# Altium PCB PCB.PcbDoc
Units mil, origin at the board's own origin, x right, y up, seen from the top; angles counter-clockwise.
Board outline 6000 x 4000 mil, 2 copper layers (Top Layer, Bottom Layer); 4 components, 0 nets, 523 pads, 0 vias.
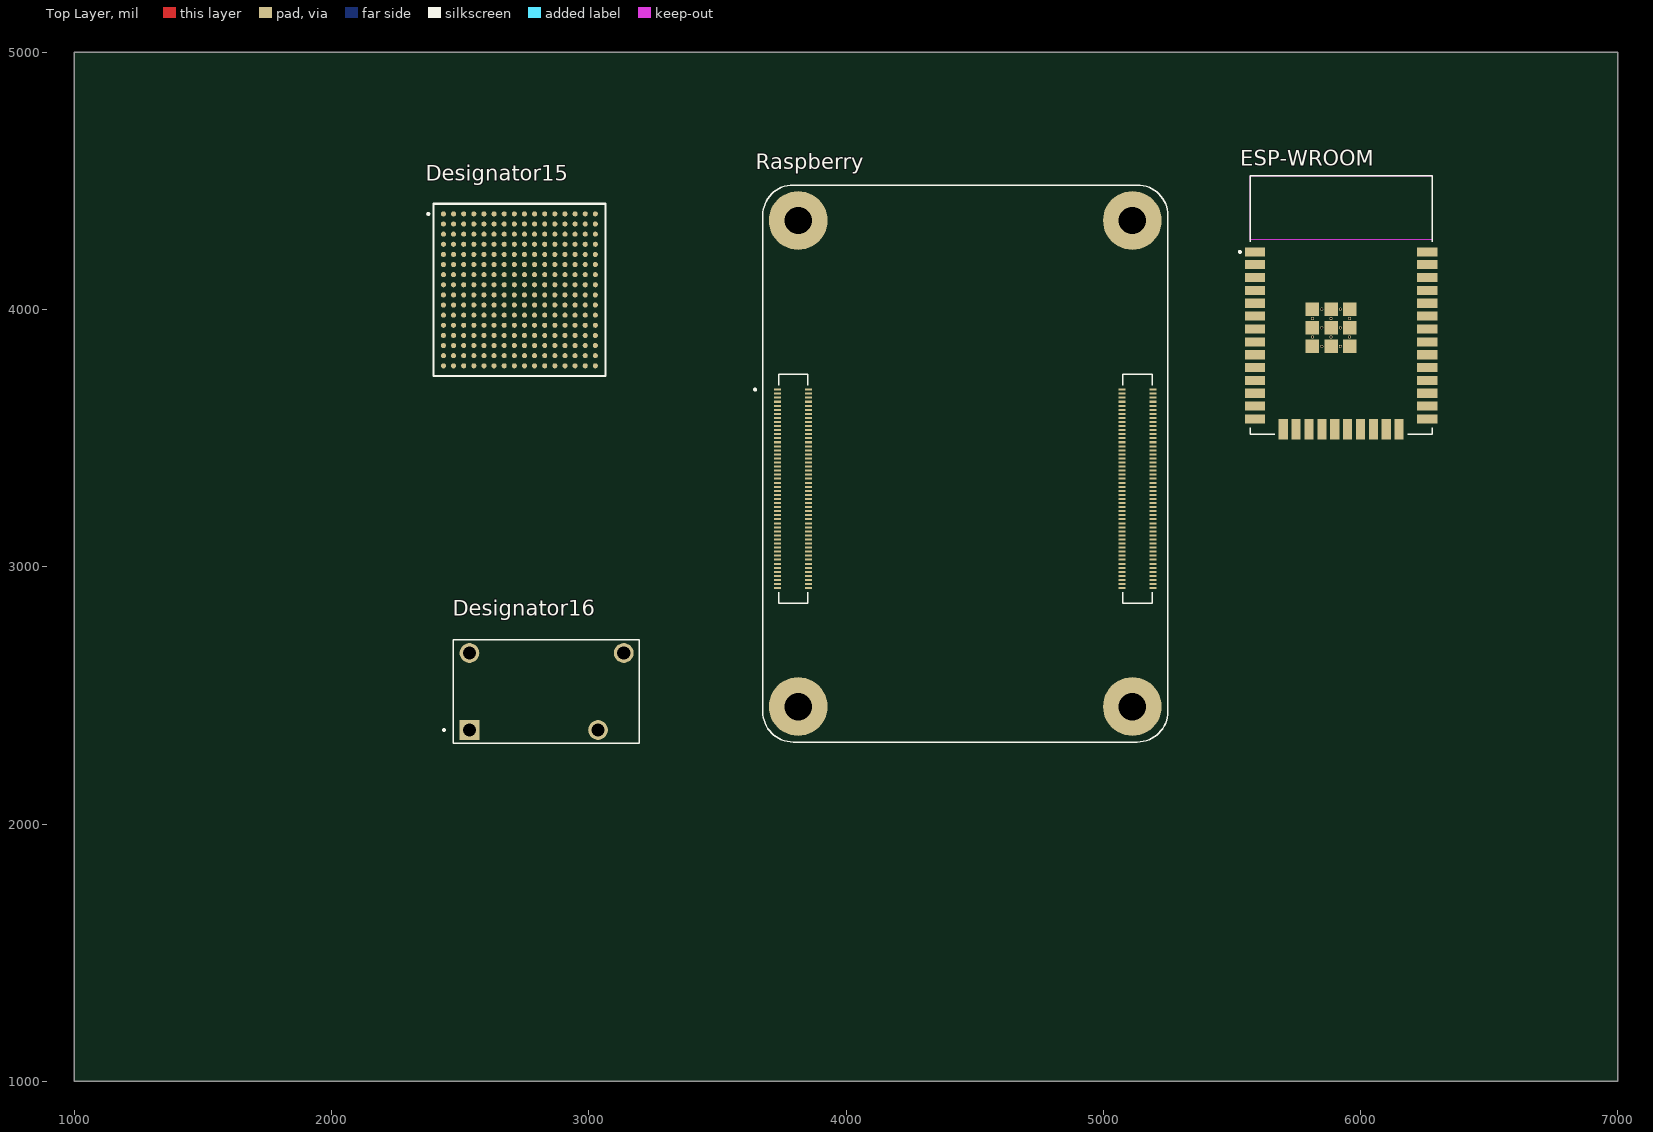
[diagram p0: Top Layer view]
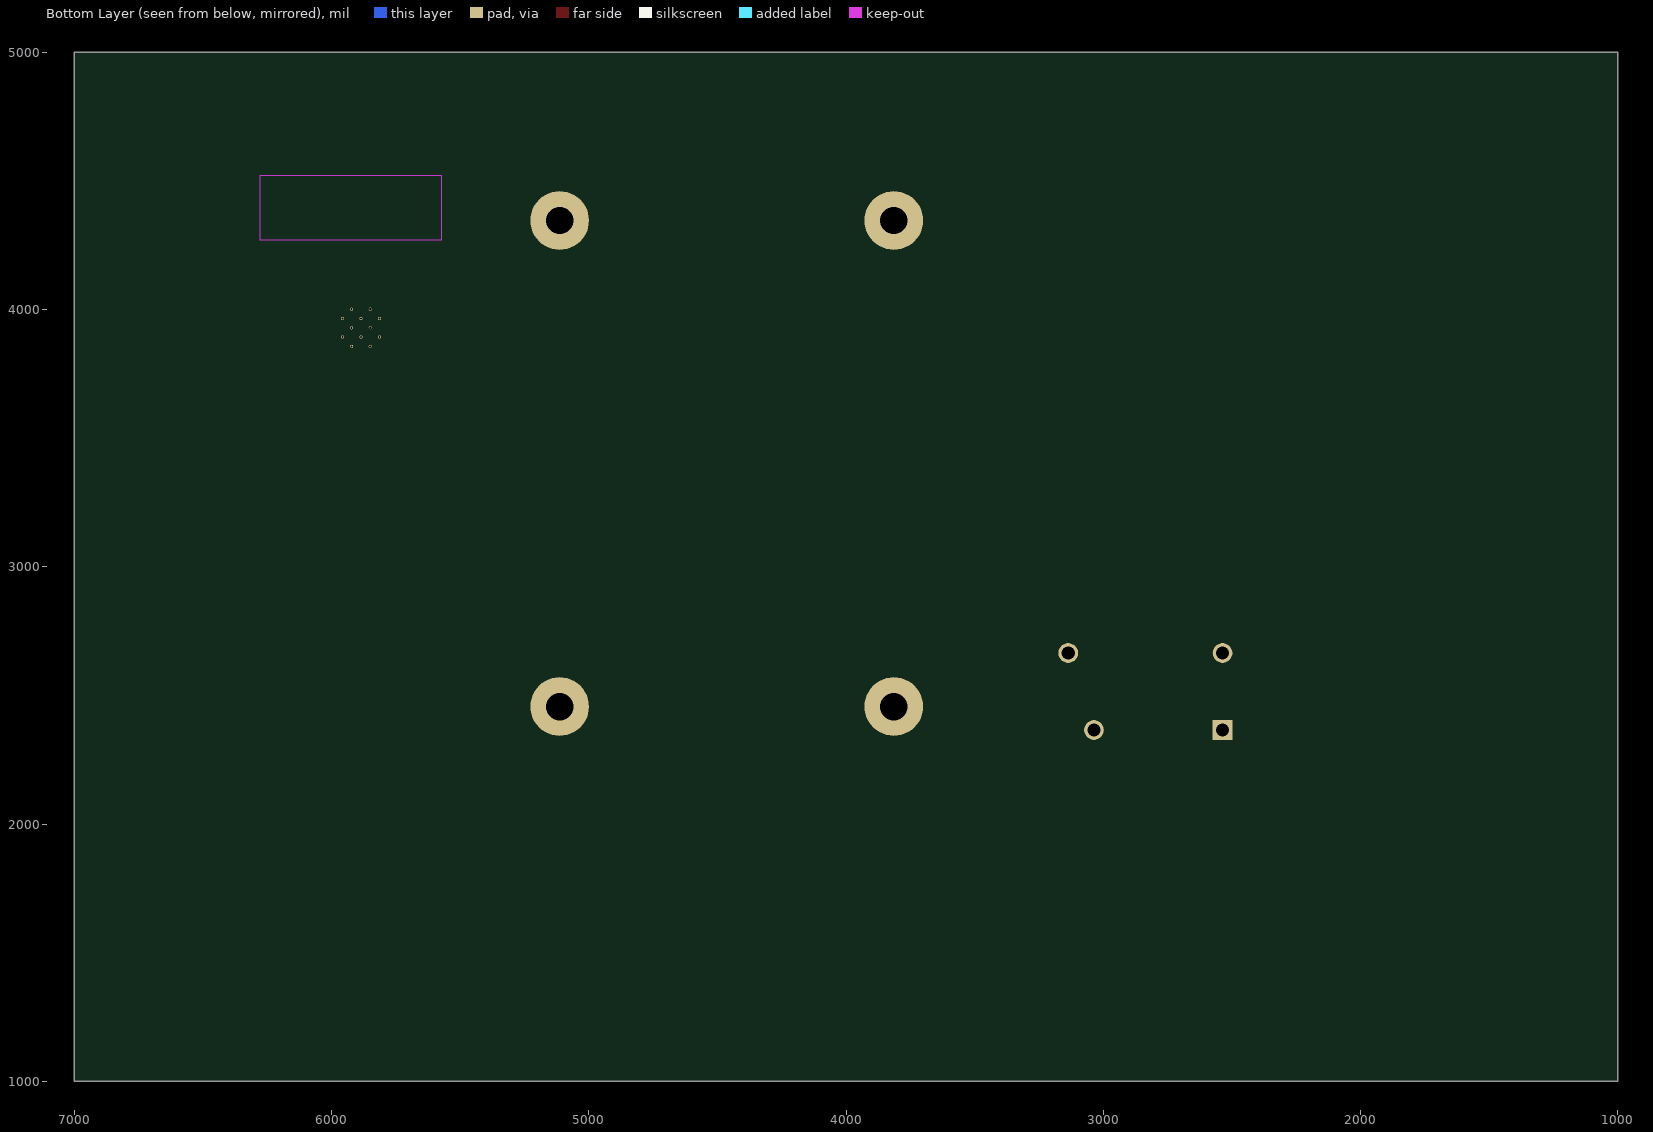
[diagram p1: Bottom Layer view, seen from below]

## Layer stack, top to bottom
Top Solder: solder mask 0.4, Solder Resist, Dk 3.5
Top Layer: signal copper 1.4
Dielectric 1: dielectric 12.6, FR-4, Dk 4.8
Bottom Layer: signal copper 1.4
Bottom Solder: solder mask 0.4, Solder Resist, Dk 3.5

## Board outline
1000,1000 7000,1000 7000,5000 1000,5000

## Design rules (kind name [scope] priority, off if disabled: settings)
Clearance [All] p1: gap=10 ignorepadtopadclearanceinfootprint=FALSE except(0: Arc-Hole Track-Hole SMDPad-Hole THPad-Hole Via-Hole Fill-Hole Poly-Hole Region-Hole Text-Hole)
PolygonConnect [All] p1: connectstyle=Relief reliefconductorwidth=10 reliefentries=4 polygonreliefangle="90 Angle" airgapwidth=10
RoomDefinition WROOM [InComponentClass('WROOM')] p1: confinementstyle=ConfineIn formatcopy=TRUE lockcomponents=FALSE outline 5540,3430 6340,3430 6340,4590 5540,4590
RoutingVias [All] p1: holewidth=28 width=50 viastyle="Through Hole" minholewidth=28 minwidth=50 maxholewidth=28 maxwidth=50
SolderMaskExpansion [All] p1: expansion=4
Width [All] p1: maxlimit=10 minlimit=10 preferedwidth=10
30 further rules are at their usual default settings.

## Classes and differential pairs
component class WROOM: ESP-WROOM
component class Sheet1: FPGA
component class Relai: Relais?
component class Raspberry: Raspberry

## Components (designator, comment, footprint, x,y, rotation, side; value= is the part's Value field where it differs from the comment)
Designator15 "Comment" BGA256C100P16X16_1700X1700X155 2730.32,4076.54 r0 top
Designator16 "Comment" RELAY_PRE29-12V-S-450-1A-EF 2835,2515 r0 top
ESP-WROOM "ESP32-WROOM-32" MODULE_ESP32-WROOM-32 5925,4017.28 r0 top
Raspberry "SC0690" MODULE_SC0690 4463.66,3401.34 r90 top

## Footprints (in the part's own frame and the unit in brackets; to place one, negate y for a bottom-side part, rotate by r counter-clockwise, add the part's x,y. Pads: shape width x height; smd on the part's side, far side on the other; paste and mask are expansions set on the pad)
BGA256C100P16X16_1700X1700X155 [mm]
  round 0.5 smd: A1(-7.5,7.5) A2(-6.5,7.5) A3(-5.5,7.5) A4(-4.5,7.5) A5(-3.5,7.5) A6(-2.5,7.5) A7(-1.5,7.5) A8(-0.5,7.5) A9(0.5,7.5) A10(1.5,7.5) A11(2.5,7.5) A12(3.5,7.5) A13(4.5,7.5) A14(5.5,7.5) A15(6.5,7.5) A16(7.5,7.5) B1(-7.5,6.5) B2(-6.5,6.5) B3(-5.5,6.5) B4(-4.5,6.5) B5(-3.5,6.5) B6(-2.5,6.5) B7(-1.5,6.5) B8(-0.5,6.5) B9(0.5,6.5) B10(1.5,6.5) B11(2.5,6.5) B12(3.5,6.5) B13(4.5,6.5) B14(5.5,6.5) B15(6.5,6.5) B16(7.5,6.5) C1(-7.5,5.5) C2(-6.5,5.5) C3(-5.5,5.5) C4(-4.5,5.5) C5(-3.5,5.5) C6(-2.5,5.5) C7(-1.5,5.5) C8(-0.5,5.5) C9(0.5,5.5) C10(1.5,5.5) C11(2.5,5.5) C12(3.5,5.5) C13(4.5,5.5) C14(5.5,5.5) C15(6.5,5.5) C16(7.5,5.5) D1(-7.5,4.5) D2(-6.5,4.5) D3(-5.5,4.5) D4(-4.5,4.5) D5(-3.5,4.5) D6(-2.5,4.5) D7(-1.5,4.5) D8(-0.5,4.5) D9(0.5,4.5) D10(1.5,4.5) D11(2.5,4.5) D12(3.5,4.5) D13(4.5,4.5) D14(5.5,4.5) D15(6.5,4.5) D16(7.5,4.5) E1(-7.5,3.5) E2(-6.5,3.5) E3(-5.5,3.5) E4(-4.5,3.5) E5(-3.5,3.5) E6(-2.5,3.5) E7(-1.5,3.5) E8(-0.5,3.5) E9(0.5,3.5) E10(1.5,3.5) E11(2.5,3.5) E12(3.5,3.5) E13(4.5,3.5) E14(5.5,3.5) E15(6.5,3.5) E16(7.5,3.5) F1(-7.5,2.5) F2(-6.5,2.5) F3(-5.5,2.5) F4(-4.5,2.5) F5(-3.5,2.5) F6(-2.5,2.5) F7(-1.5,2.5) F8(-0.5,2.5) F9(0.5,2.5) F10(1.5,2.5) F11(2.5,2.5) F12(3.5,2.5) F13(4.5,2.5) F14(5.5,2.5) F15(6.5,2.5) F16(7.5,2.5) G1(-7.5,1.5) G2(-6.5,1.5) G3(-5.5,1.5) G4(-4.5,1.5) G5(-3.5,1.5) G6(-2.5,1.5) G7(-1.5,1.5) G8(-0.5,1.5) G9(0.5,1.5) G10(1.5,1.5) G11(2.5,1.5) G12(3.5,1.5) G13(4.5,1.5) G14(5.5,1.5) G15(6.5,1.5) G16(7.5,1.5) H1(-7.5,0.5) H2(-6.5,0.5) H3(-5.5,0.5) H4(-4.5,0.5) H5(-3.5,0.5) H6(-2.5,0.5) H7(-1.5,0.5) H8(-0.5,0.5) H9(0.5,0.5) H10(1.5,0.5) H11(2.5,0.5) H12(3.5,0.5) H13(4.5,0.5) H14(5.5,0.5) H15(6.5,0.5) H16(7.5,0.5) J1(-7.5,-0.5) J2(-6.5,-0.5) J3(-5.5,-0.5) J4(-4.5,-0.5) J5(-3.5,-0.5) J6(-2.5,-0.5) J7(-1.5,-0.5) J8(-0.5,-0.5) J9(0.5,-0.5) J10(1.5,-0.5) J11(2.5,-0.5) J12(3.5,-0.5) J13(4.5,-0.5) J14(5.5,-0.5) J15(6.5,-0.5) J16(7.5,-0.5) K1(-7.5,-1.5) K2(-6.5,-1.5) K3(-5.5,-1.5) K4(-4.5,-1.5) K5(-3.5,-1.5) K6(-2.5,-1.5) K7(-1.5,-1.5) K8(-0.5,-1.5) K9(0.5,-1.5) K10(1.5,-1.5) K11(2.5,-1.5) K12(3.5,-1.5) K13(4.5,-1.5) K14(5.5,-1.5) K15(6.5,-1.5) K16(7.5,-1.5) L1(-7.5,-2.5) L2(-6.5,-2.5) L3(-5.5,-2.5) L4(-4.5,-2.5) L5(-3.5,-2.5) L6(-2.5,-2.5) L7(-1.5,-2.5) L8(-0.5,-2.5) L9(0.5,-2.5) L10(1.5,-2.5) L11(2.5,-2.5) L12(3.5,-2.5) L13(4.5,-2.5) L14(5.5,-2.5) L15(6.5,-2.5) L16(7.5,-2.5) M1(-7.5,-3.5) M2(-6.5,-3.5) M3(-5.5,-3.5) M4(-4.5,-3.5) M5(-3.5,-3.5) M6(-2.5,-3.5) M7(-1.5,-3.5) M8(-0.5,-3.5) M9(0.5,-3.5) M10(1.5,-3.5) M11(2.5,-3.5) M12(3.5,-3.5) M13(4.5,-3.5) M14(5.5,-3.5) M15(6.5,-3.5) M16(7.5,-3.5) N1(-7.5,-4.5) N2(-6.5,-4.5) N3(-5.5,-4.5) N4(-4.5,-4.5) N5(-3.5,-4.5) N6(-2.5,-4.5) N7(-1.5,-4.5) N8(-0.5,-4.5) N9(0.5,-4.5) N10(1.5,-4.5) N11(2.5,-4.5) N12(3.5,-4.5) N13(4.5,-4.5) N14(5.5,-4.5) N15(6.5,-4.5) N16(7.5,-4.5) P1(-7.5,-5.5) P2(-6.5,-5.5) P3(-5.5,-5.5) P4(-4.5,-5.5) P5(-3.5,-5.5) P6(-2.5,-5.5) P7(-1.5,-5.5) P8(-0.5,-5.5) P9(0.5,-5.5) P10(1.5,-5.5) P11(2.5,-5.5) P12(3.5,-5.5) P13(4.5,-5.5) P14(5.5,-5.5) P15(6.5,-5.5) P16(7.5,-5.5) R1(-7.5,-6.5) R2(-6.5,-6.5) R3(-5.5,-6.5) R4(-4.5,-6.5) R5(-3.5,-6.5) R6(-2.5,-6.5) R7(-1.5,-6.5) R8(-0.5,-6.5) R9(0.5,-6.5) R10(1.5,-6.5) R11(2.5,-6.5) R12(3.5,-6.5) R13(4.5,-6.5) R14(5.5,-6.5) R15(6.5,-6.5) R16(7.5,-6.5) T1(-7.5,-7.5) T2(-6.5,-7.5) T3(-5.5,-7.5) T4(-4.5,-7.5) T5(-3.5,-7.5) T6(-2.5,-7.5) T7(-1.5,-7.5) T8(-0.5,-7.5) T9(0.5,-7.5) T10(1.5,-7.5) T11(2.5,-7.5) T12(3.5,-7.5) T13(4.5,-7.5) T14(5.5,-7.5) T15(6.5,-7.5) T16(7.5,-7.5)
  silkscreen extent -9.1,-8.5 8.5,8.5, body extent -8.5,-8.5 8.5,8.5, height 1.55
MODULE_ESP32-WROOM-32 [mm]
  rect 2x0.9 smd: 1(-8.5,5.26) 2(-8.5,3.99) 3(-8.5,2.72) 4(-8.5,1.45) 5(-8.5,0.18) 6(-8.5,-1.09) 7(-8.5,-2.36) 8(-8.5,-3.63) 9(-8.5,-4.9) 10(-8.5,-6.17) 11(-8.5,-7.44) 12(-8.5,-8.71) 13(-8.5,-9.98) 14(-8.5,-11.25) 25(8.5,-11.25) 26(8.5,-9.98) 27(8.5,-8.71) 28(8.5,-7.44) 29(8.5,-6.17) 30(8.5,-4.9) 31(8.5,-3.63) 32(8.5,-2.36) 33(8.5,-1.09) 34(8.5,0.18) 35(8.5,1.45) 36(8.5,2.72) 37(8.5,3.99) 38(8.5,5.26)
  rect 0.9x2 smd: 15(-5.715,-12.25) 16(-4.445,-12.25) 17(-3.175,-12.25) 18(-1.905,-12.25) 19(-0.635,-12.25) 20(0.635,-12.25) 21(1.905,-12.25) 22(3.175,-12.25) 23(4.445,-12.25) 24(5.715,-12.25)
  rect 1.33x1.33 smd: 39_1(-2.835,-0.405) 39_2(-1,-0.405) 39_3(0.835,-0.405) 39_4(-2.835,-2.24) 39_5(-1,-2.24) 39_6(0.835,-2.24) 39_7(-2.835,-4.075) 39_8(-1,-4.075) 39_9(0.835,-4.075)
  round 0.3 hole 0.2: 39_10(-1.917,-0.405) 39_11(-0.082,-0.405) 39_12(-2.835,-1.323) 39_13(-1,-1.323) 39_14(0.835,-1.323) 39_15(-1.917,-2.24) 39_16(-0.082,-2.24) 39_17(-2.835,-3.158) 39_18(-1,-3.158) 39_19(0.835,-3.158) 39_20(-1.917,-4.075) 39_21(-0.082,-4.075)
  Keep-Out Layer region: 9,6.45 -9,6.45 -9,12.75 9,12.75
  Keep-Out Layer region: 9,6.45 -9,6.45 -9,12.75 9,12.75
  silkscreen extent -10.1,-12.75 9,12.75, body extent -9,-12.75 9,12.75, height 3.2
MODULE_SC0690 [mm]
  rect 0.2x0.7 smd: 1(7.3,18.54) 2(7.3,15.46) 3(6.9,18.54) 4(6.9,15.46) 5(6.5,18.54) 6(6.5,15.46) 7(6.1,18.54) 8(6.1,15.46) 9(5.7,18.54) 10(5.7,15.46) 11(5.3,18.54) 12(5.3,15.46) 13(4.9,18.54) 14(4.9,15.46) 15(4.5,18.54) 16(4.5,15.46) 17(4.1,18.54) 18(4.1,15.46) 19(3.7,18.54) 20(3.7,15.46) 21(3.3,18.54) 22(3.3,15.46) 23(2.9,18.54) 24(2.9,15.46) 25(2.5,18.54) 26(2.5,15.46) 27(2.1,18.54) 28(2.1,15.46) 29(1.7,18.54) 30(1.7,15.46) 31(1.3,18.54) 32(1.3,15.46) 33(0.9,18.54) 34(0.9,15.46) 35(0.5,18.54) 36(0.5,15.46) 37(0.1,18.54) 38(0.1,15.46) 39(-0.3,18.54) 40(-0.3,15.46) 41(-0.7,18.54) 42(-0.7,15.46) 43(-1.1,18.54) 44(-1.1,15.46) 45(-1.5,18.54) 46(-1.5,15.46) 47(-1.9,18.54) 48(-1.9,15.46) 49(-2.3,18.54) 50(-2.3,15.46) 51(-2.7,18.54) 52(-2.7,15.46) 53(-3.1,18.54) 54(-3.1,15.46) 55(-3.5,18.54) 56(-3.5,15.46) 57(-3.9,18.54) 58(-3.9,15.46) 59(-4.3,18.54) 60(-4.3,15.46) 61(-4.7,18.54) 62(-4.7,15.46) 63(-5.1,18.54) 64(-5.1,15.46) 65(-5.5,18.54) 66(-5.5,15.46) 67(-5.9,18.54) 68(-5.9,15.46) 69(-6.3,18.54) 70(-6.3,15.46) 71(-6.7,18.54) 72(-6.7,15.46) 73(-7.1,18.54) 74(-7.1,15.46) 75(-7.5,18.54) 76(-7.5,15.46) 77(-7.9,18.54) 78(-7.9,15.46) 79(-8.3,18.54) 80(-8.3,15.46) 81(-8.7,18.54) 82(-8.7,15.46) 83(-9.1,18.54) 84(-9.1,15.46) 85(-9.5,18.54) 86(-9.5,15.46) 87(-9.9,18.54) 88(-9.9,15.46) 89(-10.3,18.54) 90(-10.3,15.46) 91(-10.7,18.54) 92(-10.7,15.46) 93(-11.1,18.54) 94(-11.1,15.46) 95(-11.5,18.54) 96(-11.5,15.46) 97(-11.9,18.54) 98(-11.9,15.46) 99(-12.3,18.54) 100(-12.3,15.46) 101(7.3,-15.46) 102(7.3,-18.54) 103(6.9,-15.46) 104(6.9,-18.54) 105(6.5,-15.46) 106(6.5,-18.54) 107(6.1,-15.46) 108(6.1,-18.54) 109(5.7,-15.46) 110(5.7,-18.54) 111(5.3,-15.46) 112(5.3,-18.54) 113(4.9,-15.46) 114(4.9,-18.54) 115(4.5,-15.46) 116(4.5,-18.54) 117(4.1,-15.46) 118(4.1,-18.54) 119(3.7,-15.46) 120(3.7,-18.54) 121(3.3,-15.46) 122(3.3,-18.54) 123(2.9,-15.46) 124(2.9,-18.54) 125(2.5,-15.46) 126(2.5,-18.54) 127(2.1,-15.46) 128(2.1,-18.54) 129(1.7,-15.46) 130(1.7,-18.54) 131(1.3,-15.46) 132(1.3,-18.54) 133(0.9,-15.46) 134(0.9,-18.54) 135(0.5,-15.46) 136(0.5,-18.54) 137(0.1,-15.46) 138(0.1,-18.54) 139(-0.3,-15.46) 140(-0.3,-18.54) 141(-0.7,-15.46) 142(-0.7,-18.54) 143(-1.1,-15.46) 144(-1.1,-18.54) 145(-1.5,-15.46) 146(-1.5,-18.54) 147(-1.9,-15.46) 148(-1.9,-18.54) 149(-2.3,-15.46) 150(-2.3,-18.54) 151(-2.7,-15.46) 152(-2.7,-18.54) 153(-3.1,-15.46) 154(-3.1,-18.54) 155(-3.5,-15.46) 156(-3.5,-18.54) 157(-3.9,-15.46) 158(-3.9,-18.54) 159(-4.3,-15.46) 160(-4.3,-18.54) 161(-4.7,-15.46) 162(-4.7,-18.54) 163(-5.1,-15.46) 164(-5.1,-18.54) 165(-5.5,-15.46) 166(-5.5,-18.54) 167(-5.9,-15.46) 168(-5.9,-18.54) 169(-6.3,-15.46) 170(-6.3,-18.54) 171(-6.7,-15.46) 172(-6.7,-18.54) 173(-7.1,-15.46) 174(-7.1,-18.54) 175(-7.5,-15.46) 176(-7.5,-18.54) 177(-7.9,-15.46) 178(-7.9,-18.54) 179(-8.3,-15.46) 180(-8.3,-18.54) 181(-8.7,-15.46) 182(-8.7,-18.54) 183(-9.1,-15.46) 184(-9.1,-18.54) 185(-9.5,-15.46) 186(-9.5,-18.54) 187(-9.9,-15.46) 188(-9.9,-18.54) 189(-10.3,-15.46) 190(-10.3,-18.54) 191(-10.7,-15.46) 192(-10.7,-18.54) 193(-11.1,-15.46) 194(-11.1,-18.54) 195(-11.5,-15.46) 196(-11.5,-18.54) 197(-11.9,-15.46) 198(-11.9,-18.54) 199(-12.3,-15.46) 200(-12.3,-18.54)
  round 5.8 hole 2.7: SH1(-24,16.5) SH2(24,16.5) SH3(-24,-16.5) SH4(24,-16.5)
  silkscreen extent -27.5,-20 27.5,20.85
RELAY_PRE29-12V-S-450-1A-EF [mm]
  rect 1.95x1.95 / inner round 1.95 / far side rect 1.95x1.95 hole 1.3: 1(-7.59,-3.8)
  round 1.95 hole 1.3: 2(-7.59,3.8) 3(5.11,-3.8) 4(7.65,3.8)
  silkscreen extent -10.2,-5.1 9.2,5.1, body extent -9.2,-4.61 9.2,5.59, height 15.49

## Part data
ESP-WROOM: "Bluetooth, WiFi 802.11b/g/n, Bluetooth v4.2 +EDR, Class 1, 2 and 3 Transceiver Module 2.4GHz ~ 2.5GHz Antenna Not Included, U.FL Surface Mount", Package="Module Espressif Systems", Availability="In Stock", Check_prices=https://www.snapeda.com/parts/ESP32-WROOM-32/Espressif+Systems/view-part/?ref=eda, MF="Espressif Systems", MP=ESP32-WROOM-32, Price=None, Purchase-URL=https://pricing.snapeda.com/search/part/ESP32-WROOM-32/?ref=eda, SnapEDA_Link=https://www.snapeda.com/parts/ESP32-WROOM-32/Espressif+Systems/view-part/?ref=snap
Raspberry: Package=None, Availability=Unavailable, MF="{'manufacturer': u'Raspberry Pi'}", MP=SC0690, Price=None

## Nets (pads, with @x,y where several pads share a name; then routed paths per layer and width w, separated by ;. In a path a pad name is that pad's centre, name@x,y a point inside that pad or via, vN(x,y) a via of type N, cw(c..) or ccw(c..) an arc to the next point about the centre after c; other vN are vias at no path point)
pads on no net: Designator15.A1 Designator15.A2 Designator15.A3 Designator15.A4 Designator15.A5 Designator15.A6 Designator15.A7 Designator15.A8 Designator15.A9 Designator15.A10 Designator15.A11 Designator15.A12 Designator15.A13 Designator15.A14 Designator15.A15 Designator15.A16 Designator15.B1 Designator15.B2 Designator15.B3 Designator15.B4 Designator15.B5 Designator15.B6 Designator15.B7 Designator15.B8 Designator15.B9 Designator15.B10 Designator15.B11 Designator15.B12 Designator15.B13 Designator15.B14 Designator15.B15 Designator15.B16 Designator15.C1 Designator15.C2 Designator15.C3 Designator15.C4 Designator15.C5 Designator15.C6 Designator15.C7 Designator15.C8 Designator15.C9 Designator15.C10 Designator15.C11 Designator15.C12 Designator15.C13 Designator15.C14 Designator15.C15 Designator15.C16 Designator15.D1 Designator15.D2 Designator15.D3 Designator15.D4 Designator15.D5 Designator15.D6 Designator15.D7 Designator15.D8 Designator15.D9 Designator15.D10 Designator15.D11 Designator15.D12 Designator15.D13 Designator15.D14 Designator15.D15 Designator15.D16 Designator15.E1 Designator15.E2 Designator15.E3 Designator15.E4 Designator15.E5 Designator15.E6 Designator15.E7 Designator15.E8 Designator15.E9 Designator15.E10 Designator15.E11 Designator15.E12 Designator15.E13 Designator15.E14 Designator15.E15 Designator15.E16 Designator15.F1 Designator15.F2 Designator15.F3 Designator15.F4 Designator15.F5 Designator15.F6 Designator15.F7 Designator15.F8 Designator15.F9 Designator15.F10 Designator15.F11 Designator15.F12 Designator15.F13 Designator15.F14 Designator15.F15 Designator15.F16 Designator15.G1 Designator15.G2 Designator15.G3 Designator15.G4 Designator15.G5 Designator15.G6 Designator15.G7 Designator15.G8 Designator15.G9 Designator15.G10 Designator15.G11 Designator15.G12 Designator15.G13 Designator15.G14 Designator15.G15 Designator15.G16 Designator15.H1 Designator15.H2 Designator15.H3 Designator15.H4 Designator15.H5 Designator15.H6 Designator15.H7 Designator15.H8 Designator15.H9 Designator15.H10 Designator15.H11 Designator15.H12 Designator15.H13 Designator15.H14 Designator15.H15 Designator15.H16 Designator15.J1 Designator15.J2 Designator15.J3 Designator15.J4 Designator15.J5 Designator15.J6 Designator15.J7 Designator15.J8 Designator15.J9 Designator15.J10 Designator15.J11 Designator15.J12 Designator15.J13 Designator15.J14 Designator15.J15 Designator15.J16 Designator15.K1 Designator15.K2 Designator15.K3 Designator15.K4 Designator15.K5 Designator15.K6 Designator15.K7 Designator15.K8 Designator15.K9 Designator15.K10 Designator15.K11 Designator15.K12 Designator15.K13 Designator15.K14 Designator15.K15 Designator15.K16 Designator15.L1 Designator15.L2 Designator15.L3 Designator15.L4 Designator15.L5 Designator15.L6 Designator15.L7 Designator15.L8 Designator15.L9 Designator15.L10 Designator15.L11 Designator15.L12 Designator15.L13 Designator15.L14 Designator15.L15 Designator15.L16 Designator15.M1 Designator15.M2 Designator15.M3 Designator15.M4 Designator15.M5 Designator15.M6 Designator15.M7 Designator15.M8 Designator15.M9 Designator15.M10 Designator15.M11 Designator15.M12 Designator15.M13 Designator15.M14 Designator15.M15 Designator15.M16 Designator15.N1 Designator15.N2 Designator15.N3 Designator15.N4 Designator15.N5 Designator15.N6 Designator15.N7 Designator15.N8 Designator15.N9 Designator15.N10 Designator15.N11 Designator15.N12 Designator15.N13 Designator15.N14 Designator15.N15 Designator15.N16 Designator15.P1 Designator15.P2 Designator15.P3 Designator15.P4 Designator15.P5 Designator15.P6 Designator15.P7 Designator15.P8 Designator15.P9 Designator15.P10 Designator15.P11 Designator15.P12 Designator15.P13 Designator15.P14 Designator15.P15 Designator15.P16 Designator15.R1 Designator15.R2 Designator15.R3 Designator15.R4 Designator15.R5 Designator15.R6 Designator15.R7 Designator15.R8 Designator15.R9 Designator15.R10 Designator15.R11 Designator15.R12 Designator15.R13 Designator15.R14 Designator15.R15 Designator15.R16 Designator15.T1 Designator15.T2 Designator15.T3 Designator15.T4 Designator15.T5 Designator15.T6 Designator15.T7 Designator15.T8 Designator15.T9 Designator15.T10 Designator15.T11 Designator15.T12 Designator15.T13 Designator15.T14 Designator15.T15 Designator15.T16 Designator16.1 Designator16.2 Designator16.3 Designator16.4 ESP-WROOM.1 ESP-WROOM.2 ESP-WROOM.3 ESP-WROOM.4 ESP-WROOM.5 ESP-WROOM.6 ESP-WROOM.7 ESP-WROOM.8 ESP-WROOM.9 ESP-WROOM.10 ESP-WROOM.11 ESP-WROOM.12 ESP-WROOM.13 ESP-WROOM.14 ESP-WROOM.15 ESP-WROOM.16 ESP-WROOM.17 ESP-WROOM.18 ESP-WROOM.19 ESP-WROOM.20 ESP-WROOM.21 ESP-WROOM.22 ESP-WROOM.23 ESP-WROOM.24 ESP-WROOM.25 ESP-WROOM.26 ESP-WROOM.27 ESP-WROOM.28 ESP-WROOM.29 ESP-WROOM.30 ESP-WROOM.31 ESP-WROOM.32 ESP-WROOM.33 ESP-WROOM.34 ESP-WROOM.35 ESP-WROOM.36 ESP-WROOM.37 ESP-WROOM.38 ESP-WROOM.39_1 ESP-WROOM.39_2 ESP-WROOM.39_3 ESP-WROOM.39_4 ESP-WROOM.39_5 ESP-WROOM.39_6 ESP-WROOM.39_7 ESP-WROOM.39_8 ESP-WROOM.39_9 ESP-WROOM.39_10 ESP-WROOM.39_11 ESP-WROOM.39_12 ESP-WROOM.39_13 ESP-WROOM.39_14 ESP-WROOM.39_15 ESP-WROOM.39_16 ESP-WROOM.39_17 ESP-WROOM.39_18 ESP-WROOM.39_19 ESP-WROOM.39_20 ESP-WROOM.39_21 Raspberry.1 Raspberry.2 Raspberry.3 Raspberry.4 Raspberry.5 Raspberry.6 Raspberry.7 Raspberry.8 Raspberry.9 Raspberry.10 Raspberry.11 Raspberry.12 Raspberry.13 Raspberry.14 Raspberry.15 Raspberry.16 Raspberry.17 Raspberry.18 Raspberry.19 Raspberry.20 Raspberry.21 Raspberry.22 Raspberry.23 Raspberry.24 Raspberry.25 Raspberry.26 Raspberry.27 Raspberry.28 Raspberry.29 Raspberry.30 Raspberry.31 Raspberry.32 Raspberry.33 Raspberry.34 Raspberry.35 Raspberry.36 Raspberry.37 Raspberry.38 Raspberry.39 Raspberry.40 Raspberry.41 Raspberry.42 Raspberry.43 Raspberry.44 Raspberry.45 Raspberry.46 Raspberry.47 Raspberry.48 Raspberry.49 Raspberry.50 Raspberry.51 Raspberry.52 Raspberry.53 Raspberry.54 Raspberry.55 Raspberry.56 Raspberry.57 Raspberry.58 Raspberry.59 Raspberry.60 Raspberry.61 Raspberry.62 Raspberry.63 Raspberry.64 Raspberry.65 Raspberry.66 Raspberry.67 Raspberry.68 Raspberry.69 Raspberry.70 Raspberry.71 Raspberry.72 Raspberry.73 Raspberry.74 Raspberry.75 Raspberry.76 Raspberry.77 Raspberry.78 Raspberry.79 Raspberry.80 Raspberry.81 Raspberry.82 Raspberry.83 Raspberry.84 Raspberry.85 Raspberry.86 Raspberry.87 Raspberry.88 Raspberry.89 Raspberry.90 Raspberry.91 Raspberry.92 Raspberry.93 Raspberry.94 Raspberry.95 Raspberry.96 Raspberry.97 Raspberry.98 Raspberry.99 Raspberry.100 Raspberry.101 Raspberry.102 Raspberry.103 Raspberry.104 Raspberry.105 Raspberry.106 Raspberry.107 Raspberry.108 Raspberry.109 Raspberry.110 Raspberry.111 Raspberry.112 Raspberry.113 Raspberry.114 Raspberry.115 Raspberry.116 Raspberry.117 Raspberry.118 Raspberry.119 Raspberry.120 Raspberry.121 Raspberry.122 Raspberry.123 Raspberry.124 Raspberry.125 Raspberry.126 Raspberry.127 Raspberry.128 Raspberry.129 Raspberry.130 Raspberry.131 Raspberry.132 Raspberry.133 Raspberry.134 Raspberry.135 Raspberry.136 Raspberry.137 Raspberry.138 Raspberry.139 Raspberry.140 Raspberry.141 Raspberry.142 Raspberry.143 Raspberry.144 Raspberry.145 Raspberry.146 Raspberry.147 Raspberry.148 Raspberry.149 Raspberry.150 Raspberry.151 Raspberry.152 Raspberry.153 Raspberry.154 Raspberry.155 Raspberry.156 Raspberry.157 Raspberry.158 Raspberry.159 Raspberry.160 Raspberry.161 Raspberry.162 Raspberry.163 Raspberry.164 Raspberry.165 Raspberry.166 Raspberry.167 Raspberry.168 Raspberry.169 Raspberry.170 Raspberry.171 Raspberry.172 Raspberry.173 Raspberry.174 Raspberry.175 Raspberry.176 Raspberry.177 Raspberry.178 Raspberry.179 Raspberry.180 Raspberry.181 Raspberry.182 Raspberry.183 Raspberry.184 Raspberry.185 Raspberry.186 Raspberry.187 Raspberry.188 Raspberry.189 Raspberry.190 Raspberry.191 Raspberry.192 Raspberry.193 Raspberry.194 Raspberry.195 Raspberry.196 Raspberry.197 Raspberry.198 Raspberry.199 Raspberry.200 Raspberry.SH1 Raspberry.SH2 Raspberry.SH3 Raspberry.SH4

## Text inside footprints (layer, text, board x,y; h text height)
ESP-WROOM: Mechanical 13 "ANTENNA" at 5688.78,4371.61 h70
Raspberry: Mechanical 13 "1-100" at 3794.37,3302.91 h32 r90; Mechanical 13 "101-200" at 5132.95,3302.91 h32 r90